# Altium PCB MotorControl.PcbDoc
Units mm, origin at the board's own origin, x right, y up, seen from the top; angles counter-clockwise.
Board outline 70.22 x 49.44 mm, 2 copper layers (Top Layer, Bottom Layer); 61 components, 50 nets, 298 pads, 132 vias.
Unrouted connection lines stored in the file: 61.
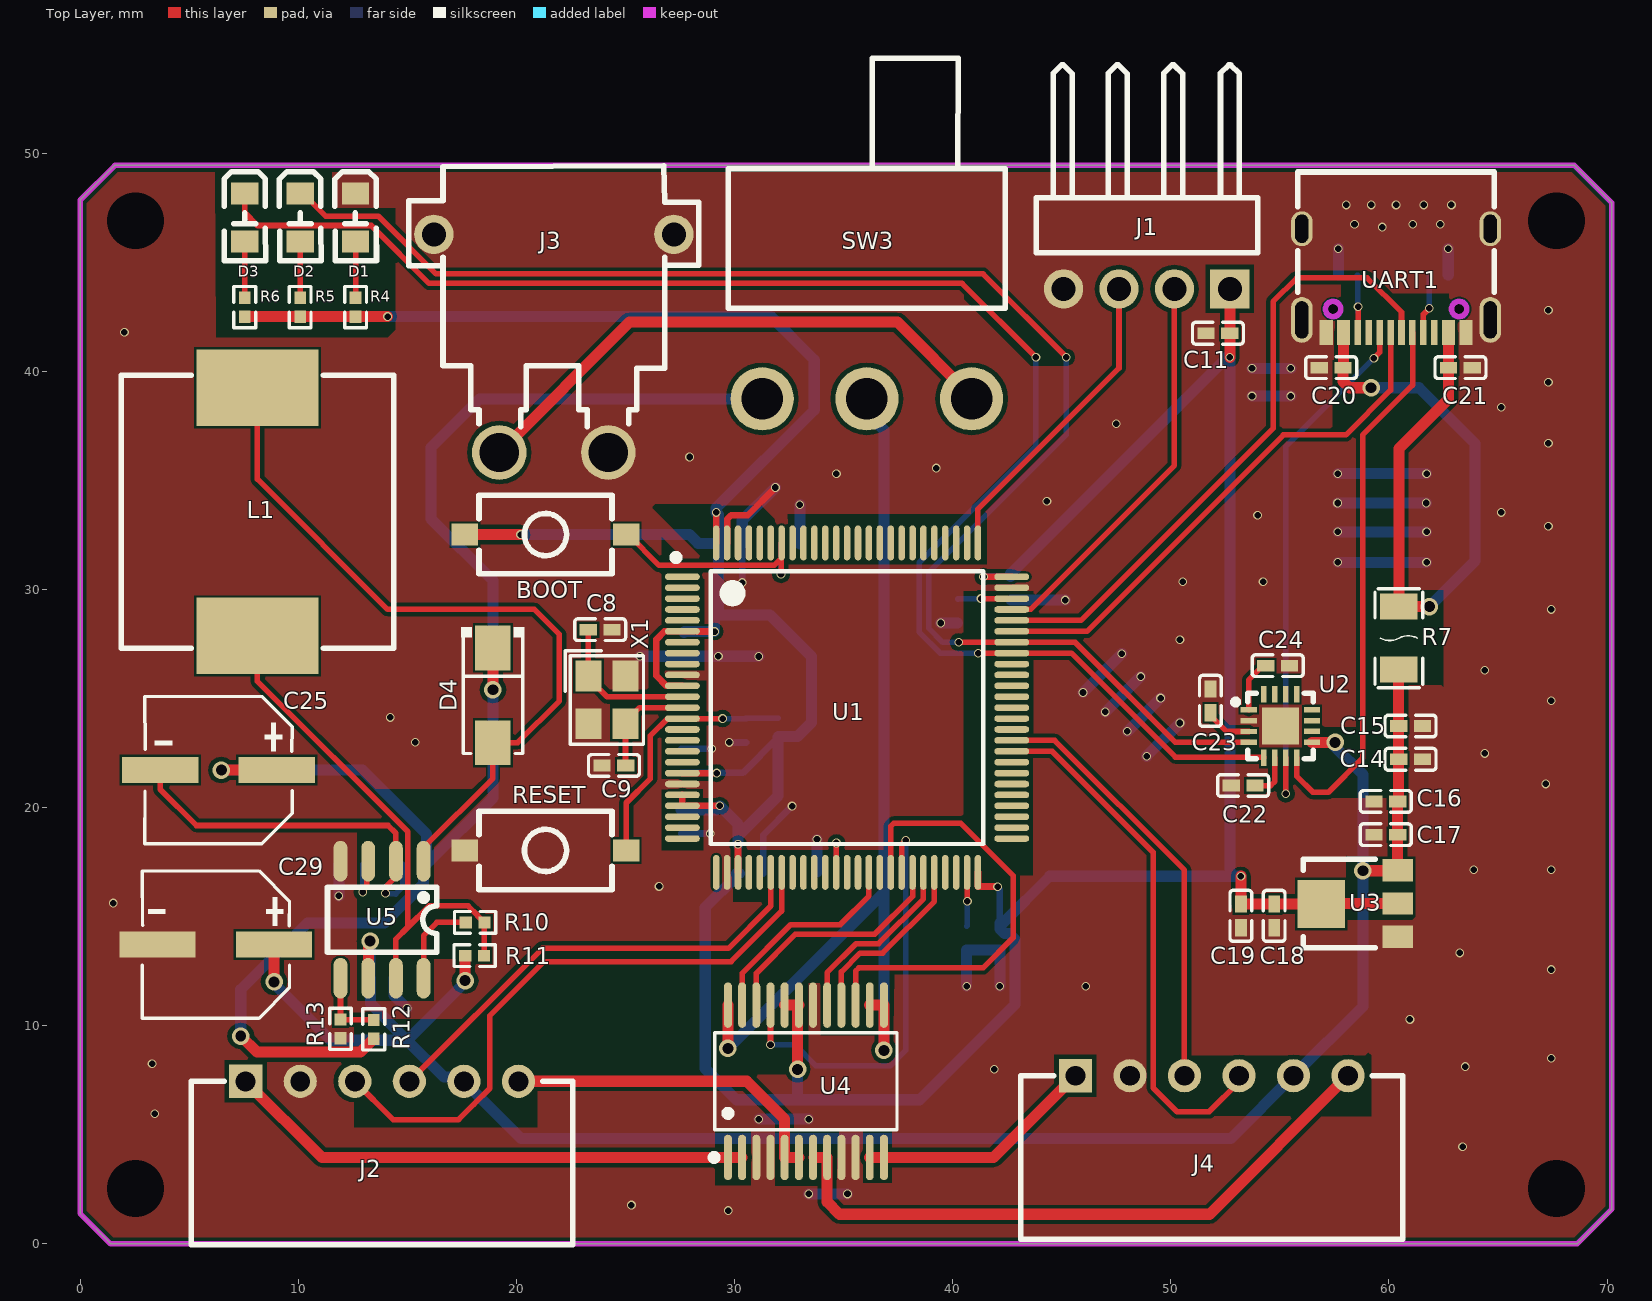
[diagram p0: Top Layer view]
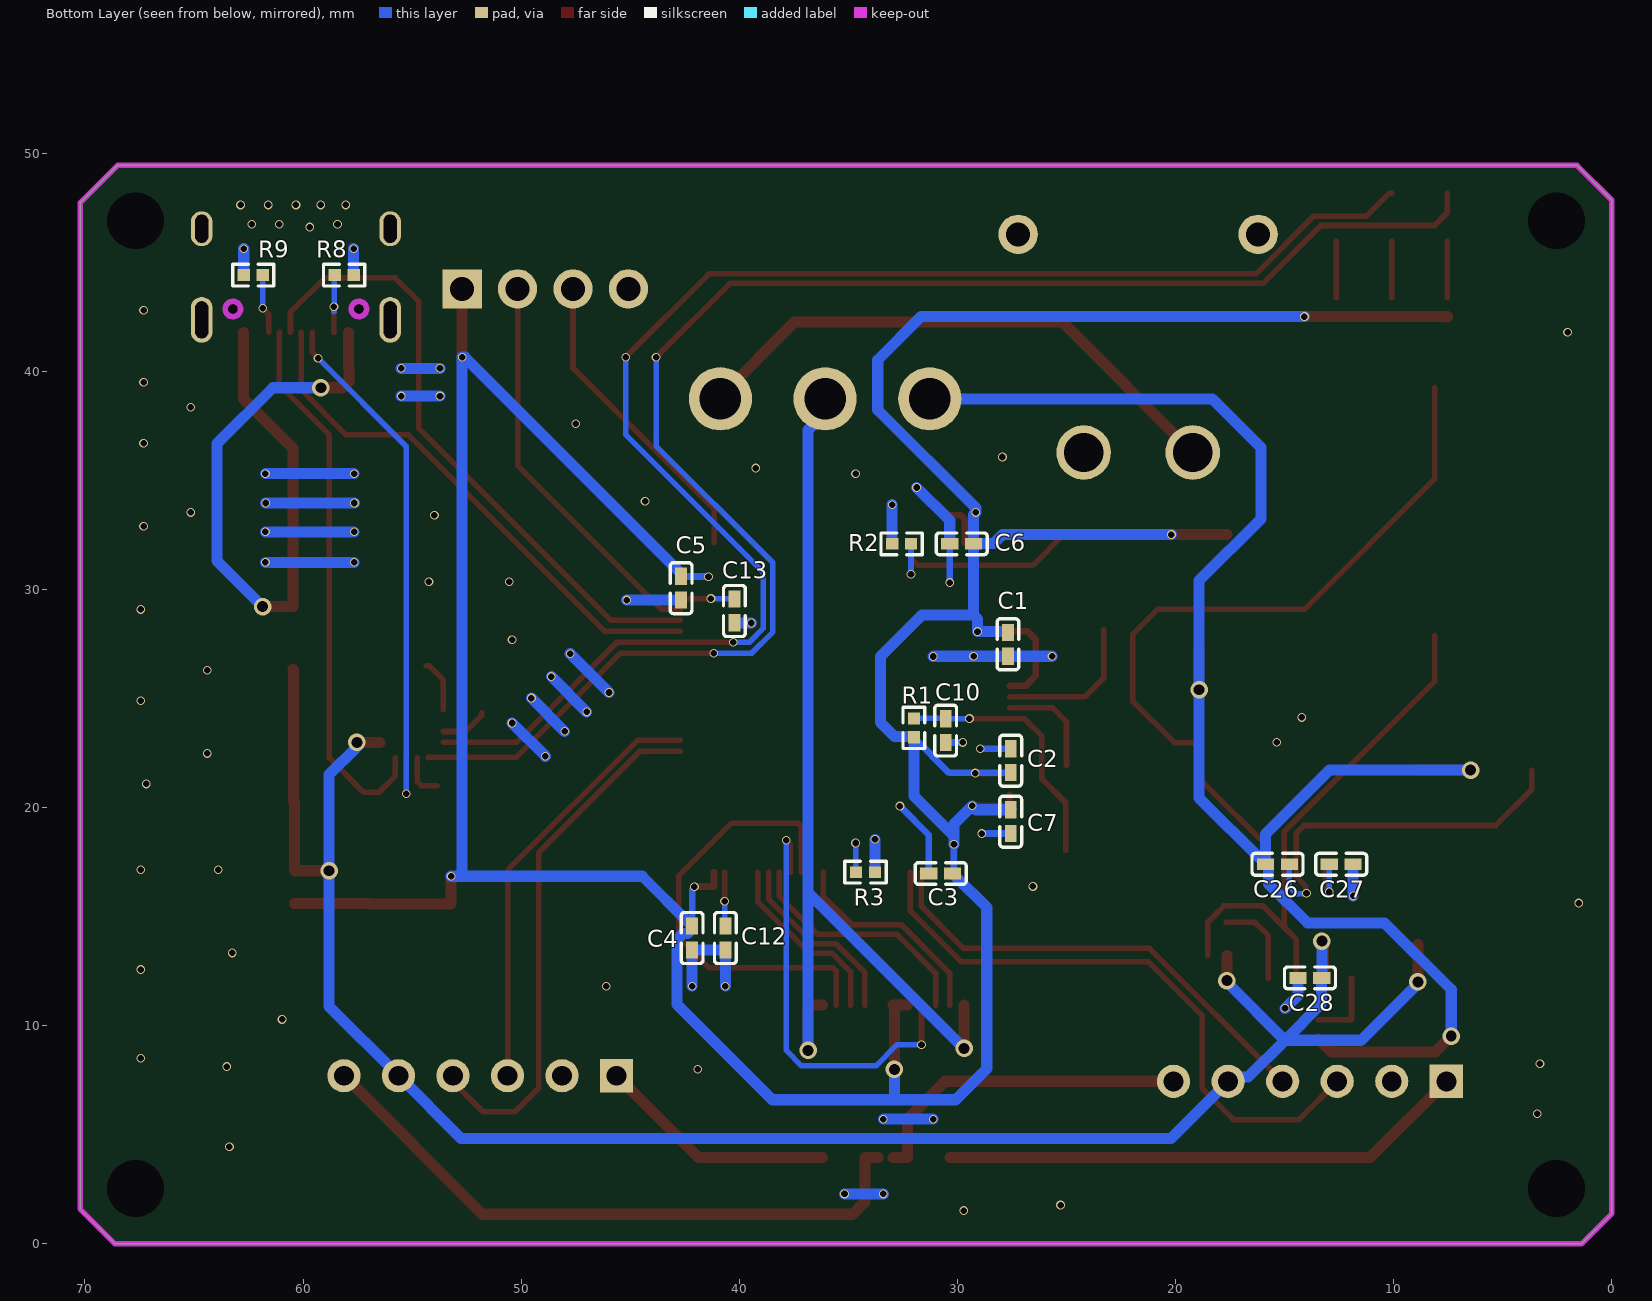
[diagram p1: Bottom Layer view, seen from below]

## Layer stack, top to bottom
Top Solder: solder mask 0.0102, Solder Resist, Dk 3.5
Top Layer: signal copper 0.0356
Dielectric 1: dielectric 0.32, FR-4, Dk 4.8
Bottom Layer: signal copper 0.0356
Bottom Solder: solder mask 0.0102, Solder Resist, Dk 3.5

## Board outline
0,1.397 1.397,0 68.621,0 70.221,1.6 70.221,47.721 68.502,49.44 1.602,49.44 0,47.838

## Design rules (kind name [scope] priority, off if disabled: settings)
Clearance [All] p1: gap=0.2 ignorepadtopadclearanceinfootprint=FALSE except(0: Arc-Hole Track-Hole SMDPad-Hole THPad-Hole Via-Hole Fill-Hole Poly-Hole Region-Hole Text-Hole; 0.1: Arc-SMDPad Track-SMDPad SMDPad-SMDPad SMDPad-Fill SMDPad-Poly SMDPad-Region; 0.18: Arc-Arc Arc-Track Arc-THPad Arc-Via Arc-Fill Arc-Poly Arc-Region Arc-Text Track-Track Track-THPad Track-Via Track-Fill Track-Poly Track-Region Track-Text; 0.5: THPad-Via Via-Via)
HoleSize [All] p1: absolutevalues=TRUE maxlimit=3.2 minlimit=0.025 maxpercent=80.000 minpercent=20.000
HoleToHoleClearance [All] p1: gap=0.305 allowstackedmicrovias=TRUE
MinimumSolderMaskSliver [All] p1: minsoldermaskwidth=0.051
PasteMaskExpansion [All] p1: expansion=0.05
PlaneClearance [All] p1: clearance=0.254
PlaneConnect [All] p1: planeconnectstyle=Direct reliefexpansion=0.508 reliefentries=4 reliefconductorwidth=0.254 reliefairgap=0.254
PolygonConnect [All] p1: connectstyle=Direct reliefconductorwidth=0.254 reliefentries=4 polygonreliefangle="90 Angle" airgapwidth=0.254
RoutingVias [All] p1: holewidth=0.3 width=0.4 viastyle="Through Hole" minholewidth=0.3 minwidth=0.4 maxholewidth=0.5 maxwidth=0.8
SilkToSilkClearance [All] p1: silktosilkclearance=0.025
SilkToSolderMaskClearance [IsPad] p1: minsilkscreentomaskgap=0.051 clearancetoexposedcopper=TRUE
SolderMaskExpansion [All] p1: expansion=0.1 istentingtop=FALSE
UnRoutedNet [All] p1: checkbadconnections=TRUE
Width PWR_Width [InNetClass('PWR')] p1: maxlimit=0.508 minlimit=0.305 preferedwidth=0.508 toplayer_prefwidth=0.305 minimp=50.000000 maximp=50.000000 favimp=50.000000
Width [All] p2: maxlimit=0.254 minlimit=0.254 preferedwidth=0.254
21 further rules are at their usual default settings.

## Classes and differential pairs
net class PWR: AO1 AO2 BO1 BO2 "EXTERNAL 12V" GND "INTERNAL 12V" "VBUS 5V" "VCC 3V3" "VCC 5V" "VM 12V"

## Components (designator, comment, footprint, x,y, rotation, side; value= is the part's Value field where it differs from the comment)
BOOT "Switch" KEY-SMD_2P-L6.0-W3.6-P7.4-LS8.0-L 21.336,18.034 r0 top (schematic designator SW2)
C1 "CAP-0402" C0402 27.686,27.481 r90 bottom
C2 "CAP-0402" C0402 27.559,22.147 r270 bottom
C3 "CAP-0402" C0402 30.771,16.977 r180 bottom
C4 "CAP-0402" C0402 42.164,14.019 r90 bottom
C5 "CAP-0402" C0402 42.672,30.058 r90 bottom
C6 "CAP-0402" C0402 29.808,32.09 r180 bottom
C7 "CAP-0402" C0402 27.559,19.353 r90 bottom
C8 "CAP-0402" C0402 23.839,28.153 r0 top
C9 "CAP-0402" C0402 24.474,21.93 r0 top
C10 "CAP-0402" C0402 30.54,23.528 r90 bottom
C11 "CAP-0402" C0402 52.16,41.742 r0 top
C12 "CAP-0402" C0402 40.64,14.019 r270 bottom
C13 "CAP-0402" C0402 40.223,29.011 r270 bottom
C14 "CAP-0402" C0402 60.989,22.213 r180 top
C15 "CAP-0402" C0402 60.989,23.737 r180 top
C16 "CAP-0402" C0402 59.854,20.279 r0 top
C17 "CAP-0402" C0402 59.854,18.755 r0 top
C18 "CAP-0402" C0402 54.737,15.035 r90 top
C19 "CAP-0402" C0402 53.213,15.035 r90 top
C20 "CAP-0402" C0402 57.348,40.163 r0 top
C21 "CAP-0402" C0402 63.275,40.163 r180 top
C22 "CAP-0402" C0402 53.313,21.009 r180 top
C23 "CAP-0402" C0402 51.816,24.888 r90 top
C24 "CAP-0402" C0402 54.901,26.502 r0 top
C25 "470uF" CAP-SMD_BD6.3-L6.6-W6.6-LS7.6-RD 6.347,21.717 r180 top
C26 "CAP-0402" C0402 15.33,17.399 r0 bottom
C27 "CAP-0402" C0402 12.409,17.399 r0 bottom
C28 "CAP-0402" C0402 13.843,12.192 r180 bottom
C29 "100uF" CAP-SMD_BD6.3-L6.6-W6.6-LS7.2-FD 6.223,13.716 r180 top
D1 "LED0805-RD" LED0805-RD 12.629,47.054 r270 top
D2 "LED0805-RD" LED0805-RD 10.089,47.054 r270 top
D3 "LED0805-RD" LED0805-RD 7.549,47.054 r270 top
D4 "SS34A" SMA_L4.4-W2.6-LS5.1-RD 18.923,25.146 r270 top
J1 "HDR-1X4" HDR-TH_4P-P2.54-H-M-W10.4 48.895,43.774 r180 top
J2 "WAFER-XH254WZ-6A" CONN-TH_6P-P2.50_WAFER-XH254WZ-6A 13.843,7.452 r0 top
J3 "XT30PW-M30.G.Y" CONN-TH_XT30PW-M 21.717,41.275 r180 top
J4 "WAFER-XH254WZ-6A" CONN-TH_6P-P2.50_WAFER-XH254WZ-6A 51.876,7.706 r0 top
L1 "" IND-SMD_L12.5-W12.5_GSDRK127P 8.128,33.556 r270 top value=150uH
R1 "RES-0402" R0402 32,23.652 r270 bottom
R2 "RES-0402" R0402 32.564,32.09 r0 bottom
R3 "RES-0402" R0402 34.216,17.036 r0 bottom
R4 "RES-0402" R0402 12.629,42.938 r270 top
R5 "RES-0402" R0402 10.089,42.938 r270 top
R6 "RES-0402" R0402 7.549,42.938 r270 top
R7 "TLC F1206" F1206 60.452,27.765 r270 top
R8 "RES-0402" R0402 58.114,44.409 r180 bottom
R9 "RES-0402" R0402 62.283,44.409 r0 bottom
R10 "RES-0402" R0402 18.109,14.732 r0 top
R11 "RES-0402" R0402 18.086,13.208 r0 top
R12 "RES-0402" R0402 13.462,9.831 r90 top
R13 "RES-0402" R0402 11.938,9.854 r270 top
RESET "Switch" KEY-SMD_2P-L6.0-W3.6-P7.4-LS8.0-L 21.336,32.512 r180 top (schematic designator SW1)
SW3 "Switch-弯插滑动开关" SW-TH_3P-SS12D06-1 36.068,38.735 r180 top
U1 "STM32F407VET6" LQFP-100_L14.0-W14.0-P0.50-LS16.0-BL 35.16,24.578 r270 top
U2 "CH343P" TQFN-16_L3.0-W3.0-P0.50-BL-EP1.7 55.02,23.737 r270 top
U3 "CJA1117B-3.3" SOT-89 60.381,15.65 r90 top
U4 "TB6612FNG" SSOP-24_L8.4-W5.8-P0.65-LS7.8-BL 33.274,7.452 r0 top
U5 "MC34063" SOP-8_L4.9-W3.9-P1.27-LS6.0-BL 13.843,14.859 r180 top
UART1 "HC-TYPE-C-16P-01A-R" USB-C-SMD_G-SWITCH_GT-USB-7010EN 60.325,44.155 r180 top
X1 "OSC CRYSTAL-SMD_4P-L3.2-W2.5-BL" CRYSTAL-SMD_4P-L3.2-W2.5-BL 24.153,24.931 r270 top

## Footprints (in the part's own frame and the unit in brackets; to place one, negate y for a bottom-side part, rotate by r counter-clockwise, add the part's x,y. Pads: shape width x height; smd on the part's side, far side on the other; paste and mask are expansions set on the pad)
C0402 [mm]
  rect 0.79x0.54 smd paste-100 mask+0.051: 1(-0.545,0) 2(0.545,0)
  silkscreen extent -1.17,-0.5 1.17,0.5
CAP-SMD_BD6.3-L6.6-W6.6-LS7.2-FD [mm]
  rect 3.5x1.2 smd: 1(-2.67,0) 2(2.67,0)
  silkscreen extent -3.38,-3.38 3.38,3.38
CAP-SMD_BD6.3-L6.6-W6.6-LS7.6-RD [mm]
  rect 3.5x1.2 smd: 1(-2.67,0) 2(2.67,0)
  silkscreen extent -3.38,-3.38 3.38,3.38
CONN-TH_6P-P2.50_WAFER-XH254WZ-6A [mil]
  rect 60x60 hole 36: 1(-246.07,0)
  round 60 hole 36: 2(-147.64,0) 3(-49.22,0) 4(49.21,0) 5(147.64,0) 6(246.06,0)
  silkscreen extent -344,-295 344,0
CONN-TH_XT30PW-M [mm]
  round 2.5 hole 1.8: 1(-2.5,5) 2(2.5,5)
  round 1.8 hole 1.1: 3(5.5,-5) 4(-5.5,-5)
  silkscreen extent -6.65,-8.15 6.65,3.81
CRYSTAL-SMD_4P-L3.2-W2.5-BL [mm]
  rect 1.4x1.2 smd paste+0 mask+0.051: 1(-1.1,-0.85) 2(1.1,-0.85) 3(1.1,0.85) 4(-1.1,0.85)
  silkscreen extent -2.26,-1.91 2.03,1.68
F1206 [mil]
  rect 46.9x68 smd paste+0 mask+2: 1(-56.9,0) 2(56.9,0)
  silkscreen extent -89,-43 89,43
HDR-TH_4P-P2.54-H-M-W10.4 [mm]
  rect 1.8x1.8 hole 1.1: 1(-3.81,0)
  round 1.8 hole 1.1: 2(-1.27,0) 3(1.27,0) 4(3.81,0)
  silkscreen extent -5.09,-10.27 5.07,-1.65
IND-SMD_L12.5-W12.5_GSDRK127P [mm]
  rect 3.5x5.6 smd: 1(-5.687,0) 2(5.687,0)
  silkscreen extent -6.25,-6.25 6.25,6.25
KEY-SMD_2P-L6.0-W3.6-P7.4-LS8.0-L [mm]
  rect 1.2x1 smd: 1(-3.7,0) 2(3.7,0)
  silkscreen extent -3.05,-1.8 3.05,1.8
LED0805-RD [mm]
  rect 1x1.25 smd paste+0 mask+0.051: 1(-1.1,0) 2(1.1,0)
  silkscreen extent -2.1,-0.95 1.98,0.96
LQFP-100_L14.0-W14.0-P0.50-LS16.0-BL [mm]
  oval 0.3x1.6 smd paste-100 mask+0.051: 1(-6,-7.55) 2(-5.5,-7.55) 3(-5,-7.55) 4(-4.5,-7.55) 5(-4,-7.55) 6(-3.5,-7.55) 7(-3,-7.55) 8(-2.5,-7.55) 9(-2,-7.55) 10(-1.5,-7.55) 11(-1,-7.55) 12(-0.5,-7.55) 13(0,-7.55) 14(0.5,-7.55) 15(1,-7.55) 16(1.5,-7.55) 17(2,-7.55) 18(2.5,-7.55) 19(3,-7.55) 20(3.5,-7.55) 21(4,-7.55) 22(4.5,-7.55) 23(5,-7.55) 24(5.5,-7.55) 25(6,-7.55) 51(6,7.55) 52(5.5,7.55) 53(5,7.55) 54(4.5,7.55) 55(4,7.55) 56(3.5,7.55) 57(3,7.55) 58(2.5,7.55) 59(2,7.55) 60(1.5,7.55) 61(1,7.55) 62(0.5,7.55) 63(0,7.55) 64(-0.5,7.55) 65(-1,7.55) 66(-1.5,7.55) 67(-2,7.55) 68(-2.5,7.55) 69(-3,7.55) 70(-3.5,7.55) 71(-4,7.55) 72(-4.5,7.55) 73(-5,7.55) 74(-5.5,7.55) 75(-6,7.55)
  oval 1.6x0.3 smd paste-100 mask+0.051: 26(7.55,-6) 27(7.55,-5.5) 28(7.55,-5) 29(7.55,-4.5) 30(7.55,-4) 31(7.55,-3.5) 32(7.55,-3) 33(7.55,-2.5) 34(7.55,-2) 35(7.55,-1.5) 36(7.55,-1) 37(7.55,-0.5) 38(7.55,0) 39(7.55,0.5) 40(7.55,1) 41(7.55,1.5) 42(7.55,2) 43(7.55,2.5) 44(7.55,3) 45(7.55,3.5) 46(7.55,4) 47(7.55,4.5) 48(7.55,5) 49(7.55,5.5) 50(7.55,6) 76(-7.55,6) 77(-7.55,5.5) 78(-7.55,5) 79(-7.55,4.5) 80(-7.55,4) 81(-7.55,3.5) 82(-7.55,3) 83(-7.55,2.5) 84(-7.55,2) 85(-7.55,1.5) 86(-7.55,1) 87(-7.55,0.5) 88(-7.55,0) 89(-7.55,-0.5) 90(-7.55,-1) 91(-7.55,-1.5) 92(-7.55,-2) 93(-7.55,-2.5) 94(-7.55,-3) 95(-7.55,-3.5) 96(-7.55,-4) 97(-7.55,-4.5) 98(-7.55,-5) 99(-7.55,-5.5) 100(-7.55,-6)
  silkscreen extent -7.03,-8 6.25,6.25
R0402 [mm]
  rect 0.566x0.54 smd paste-100 mask+0.051: 1(-0.433,0) 2(0.433,0)
  silkscreen extent -0.94,-0.5 0.94,0.5
SMA_L4.4-W2.6-LS5.1-RD [mm]
  rect 2.046x1.62 smd: 1(-2.169,0) 2(2.169,0)
  silkscreen extent -3.12,-1.44 2.67,1.44
SOP-8_L4.9-W3.9-P1.27-LS6.0-BL [mm]
  oval 0.63x1.865 smd: 1(-1.905,-2.682) 2(-0.635,-2.682) 3(0.635,-2.682) 4(1.905,-2.682) 5(1.905,2.682) 6(0.635,2.682) 7(-0.635,2.682) 8(-1.905,2.682)
  silkscreen extent -2.5,-1.5 2.5,1.48
SOT-89 [mil]
  rect 40x55 smd paste+0 mask+4: 1(-61.81,-0.58) 2(-1.81,-0.58) 3(58.19,-0.58)
  rect 86.61x86.61 smd paste+0 mask+4: 2(-2.76,137.22)
  silkscreen extent -82,39 78,169
SSOP-24_L8.4-W5.8-P0.65-LS7.8-BL [mm]
  oval 0.364x2.082 smd: 1(-3.575,-3.491) 2(-2.925,-3.491) 3(-2.275,-3.491) 4(-1.625,-3.491) 5(-0.975,-3.491) 6(-0.325,-3.491) 7(0.325,-3.491) 8(0.975,-3.491) 9(1.625,-3.491) 10(2.275,-3.491) 11(2.925,-3.491) 12(3.575,-3.491) 13(3.575,3.491) 14(2.925,3.491) 15(2.275,3.491) 16(1.625,3.491) 17(0.975,3.491) 18(0.325,3.491) 19(-0.325,3.491) 20(-0.975,3.491) 21(-1.625,3.491) 22(-2.275,3.491) 23(-2.925,3.491) 24(-3.575,3.491)
  silkscreen extent -4.36,-3.64 4.18,2.22
SW-TH_3P-SS12D06-1 [mm]
  round 2.9 hole 1.9: 1(-4.8,0) 2(0,0) 3(4.8,0)
  silkscreen extent -6.35,-15.62 6.35,-4.15
TQFN-16_L3.0-W3.0-P0.50-BL-EP1.7 [mm]
  rect 0.25x0.75 smd paste-100 mask+0.051: 1(-0.748,-1.45) 2(-0.249,-1.45) 3(0.252,-1.45) 4(0.751,-1.45) 9(0.75,1.45) 10(0.25,1.45) 11(-0.25,1.45) 12(-0.749,1.45)
  rect 0.75x0.25 smd paste-100 mask+0.051: 5(1.45,-0.75) 6(1.45,-0.25) 7(1.45,0.25) 8(1.45,0.75) 13(-1.45,0.75) 14(-1.45,0.25) 15(-1.45,-0.25) 16(-1.45,-0.75)
  rect 1.7x1.7 smd paste-100 mask+0.051: 17(0,0)
  silkscreen extent -1.5,-2.17 1.5,1.5
USB-C-SMD_G-SWITCH_GT-USB-7010EN [mm]
  oval 1x2.1 hole 0.6 slot 1.7 at 90 deg paste+0 mask+0.05: 1(-4.32,1.803) 2(4.32,1.803)
  oval 1x1.6 hole 0.6 slot 1.3 at 90 deg paste+0 mask+0.05: 3(4.32,-2.378) 4(-4.32,-2.378)
  rect 0.6x1.15 smd paste-100 mask+0.05: A1B12(-3.2,2.378) A4B9(-2.4,2.378) B1A12(3.2,2.378) B4A9(2.4,2.378)
  rect 0.3x1.15 smd paste-100 mask+0.05: A5(-1.25,2.378) A6(-0.25,2.378) A7(0.25,2.378) A8(1.25,2.378) B5(1.75,2.378) B6(0.75,2.378) B7(-0.75,2.378) B8(-1.75,2.378)
  Keep-Out Layer board cut-out: 2.89,1.652 2.82,1.652 2.692,1.599 2.593,1.5 2.54,1.372 2.54,1.232 2.593,1.104 2.692,1.005 2.82,0.952 2.89,0.952 2.96,0.952 3.088,1.005 3.187,1.104 3.24,1.232 3.24,1.372 3.187,1.5 3.088,1.599 2.96,1.652 2.89,1.652 2.89,1.652
  Keep-Out Layer board cut-out: -2.89,1.652 -2.96,1.652 -3.088,1.599 -3.187,1.501 -3.24,1.372 -3.24,1.233 -3.187,1.104 -3.088,1.006 -2.96,0.952 -2.89,0.952 -2.82,0.952 -2.692,1.006 -2.593,1.104 -2.54,1.233 -2.54,1.372 -2.593,1.501 -2.692,1.599 -2.82,1.652 -2.89,1.652 -2.89,1.652
  Keep-Out Layer circle w0.005: c2.89,1.302 r0.35
  Keep-Out Layer circle w0.254: c2.89,1.302 r0.35
  Keep-Out Layer circle w0.005: c-2.89,1.302 r0.35
  Keep-Out Layer circle w0.254: c-2.89,1.302 r0.35
  silkscreen extent -4.5,-4.98 4.5,0.54

## Part data
BOOT RESET: "滑动开关", Actuator/Cap Color=白色, Contact Current=50mA, Insulation Resistance=-, JLCPCB Part Class=扩展库, LCSC Part Name="6*3.6*2.5mm 立贴 轻触开关", Manufacturer="XKB Connectivity(中国星坤)", Manufacturer Part=TS-1101-B-W, Operating Force=160gf, Operating Temperature=-30℃~+85℃, Voltage Rating (DC)=12V, Actuator Style=矩形按钮, Add into BOM=yes, Circuit=单刀单掷, Convert to PCB=yes, Datasheet=https://atta.szlcsc.com/upload/public/pdf/source/20211011/D0E0CAF534F7B19DDE4CE68748A25BD3.pdf, Device=TS-1101-B-W_C500065, Mechanical Life=5万次, Mounting Style=立贴, Strike Gundam=否, Supplier=LCSC, Supplier Footprint=SMD, Supplier Part=C500065, Switch Height=2.5mm, Switch Length=6mm, Switch Width=3.6mm, Symbol=TS-1101-B-W, With Lamp=无
C1 C2 C3 C4 C5 C6 C7 C8 C9 C10 C11 C12 C13 C14 C15 C16 C17 C18 C19 C20 C21 C22 C23 C24 C26 C27 C28: "0402贴片电容", JLCPCB Part Class="Extended Part", LCSC Part Name="100nF ±10% 50V", Manufacturer=SAMSUNG(三星), Manufacturer Part=CL21B104KBCNNNC, Temperature Coefficient=X7R, Tolerance=±10%, Voltage Rated=50V, Add into BOM=yes, Convert to PCB=yes, Datasheet=https://atta.szlcsc.com/upload/public/pdf/source/20160103/1457707693305.pdf, Device=CL21B104KBCNNNC, Supplier=LCSC, Supplier Footprint=0805, Supplier Part=C1711, Symbol=CL21B104KBCNNNC
C25: library part RVT1C471M0607, "铝电解电容 470uF", JLCPCB Part Class="Extended Part", LCSC Part Name="470uF ±20% 16V", Lifetime @ Temp=2000hrs@105℃, Manufacturer=ROQANG(容强), Operating Temperature=-40℃~+105℃, Rated Voltage=16V, Ripple Current=185mA@120Hz, Tolerance=±20%, Add into BOM=yes, Convert to PCB=yes, Datasheet=https://atta.szlcsc.com/upload/public/pdf/source/20220223/DD822675CC1DF2F0C06D5C2255C9C2D9.pdf, Device=RVT1C471M0607, L=7.7mm, Manufacturer Part=RVT1C471M0607, Supplier=LCSC, Supplier Footprint=SMD,D6.3xL7.7mm, Supplier Part=C2977552, Symbol=RVT1C471M0607, φD=6.3mm
C29: library part RVT100UF16V67RV0016, "铝电解电容 100uF", Equivalent Series Resistance(ESR)=-, JLCPCB Part Class="Extended Part", LCSC Part Name="100uF ±20% 16V", Lifetime @ Temp=2000hrs@105℃, Manufacturer=KNSCHA(科尼盛), Operating Temperature=-55℃~+105℃, Rated Voltage=16V, Ripple Current=93mA@120Hz, Tolerance=±20%, Add into BOM=yes, Convert to PCB=yes, Datasheet=https://atta.szlcsc.com/upload/public/pdf/source/20240521/3810EB5B434F72326C196D6A9426C70A.pdf, Device=RVT100UF16V67RV0016, L=5.4mm, Manufacturer Part=RVT100UF16V67RV0016, Supplier=LCSC, Supplier Footprint=SMD,D6.3xL5.4mm, Supplier Part=C2887276, Symbol=RVT100UF16V67RV0016, φD=6.3mm
D1 D2 D3: "LED", Color Temperature=-, Forward Current=20mA, Forward Voltage (VF)=3.3V, JLCPCB Part Class="Extended Part", LCSC Part Name=LED贴片0805超高亮蓝光, Lens Color=无色透明, Manufacturer=MEIHUA(美华科技), Manufacturer Part=MHT170UBCT, Operating Temperature=-40~+85, Power Dissipation=95mW, Add into BOM=yes, Convert to PCB=yes, Datasheet=https://atta.szlcsc.com/upload/public/pdf/source/20190515/C389525_9DDE5770D44EFFE682D3E1E38A61D6F4.pdf, Device=MHT170UBCT, Diode Configuration=-, Dominant Wavelength=460nm~475nm, Luminous Flux (@25℃)=-, Luminous Intensity=225mcd, Mounting Sytle=-, Peak Wavelength=468nm, Supplier=LCSC, Supplier Footprint=0805, Supplier Part=C389525, Symbol=MHT170UBCT, Viewing Angle=140°
D4: library part SS34A_C2886580, "肖特基二极管", Forward Voltage (Vf@If)=500mV@3A, JLCPCB Part Class="Extended Part", LCSC Part Name="电压:40V 电流:3A", Manufacturer=Hottech(合科泰), Rectified Current=3A, Reverse Leakage Current (Ir)=500uA@40V, Reverse Voltage (Vr)=40V, Add into BOM=yes, Convert to PCB=yes, Datasheet=https://atta.szlcsc.com/upload/public/pdf/source/20220428/CC15BDAC1896772FBF35067304521A73.pdf, Device=SS34A_C2886580, Diode Configuration=独立式, Manufacturer Part=SS34A, Supplier=LCSC, Supplier Footprint=SMA(DO-214AC), Supplier Part=C2886580, Symbol=SS34A_C2886580
J1: library part HDR-1X4-弯排针, "1X4弯排针", Add into BOM=yes, Convert to PCB=yes, Device=HDR-M_2.54_1x4P, Supplier Footprint=插件, Supplier Part=C2935929, Symbol=PZ254V-11-04P
J2 J4: "XH2.54 6P弯插公头", Current Rating (Max)=3A, JLCPCB Part Class="Extended Part", Manufacturer=HANBO(汉博), Operating Temperature Range=-25℃~+85℃, Add into BOM=yes, Convert to PCB=yes, Datasheet=https://atta.szlcsc.com/upload/public/pdf/source/20230721/127D646758C1D4B76FEF9901992220E1.pdf, Device=WAFER-XH254WZ-6A, LCSC Part Name=WAFER-XH254WZ-6A, Manufacturer Part=WAFER-XH254WZ-6A, Mounting Style=弯插, Number of Pins=6P, Number of PINs Per Row=6, Number of Rows=1, Pins Structure=1x6P, Pitch=2.54mm, Reference Series=XH, Supplier=LCSC, Supplier Footprint=插件,P=2.5mm, Supplier Part=C7432695, Symbol=WAFER-XH254WZ-6A
J3: "XT30公头", Colour=-, contact resistance=1.2mΩ, JLCPCB Part Class="Extended Part", LCSC Part Name="AMASS(艾迈斯)航模插头 卧式弯脚 XT30PW-M公头", Manufacturer=AMASS(艾迈斯), RatedCurrent=15A, RatedVoltage="DC 500V", Add into BOM=yes, Belt length=-, Convert to PCB=yes, Datasheet=https://atta.szlcsc.com/upload/public/pdf/source/20220222/6A9F22F7850E25B33E1BE430ADF8560B.pdf, Device=XT30PW-M30.G.Y, FlameRetardantGrade=-, Input=-, InsulationMaterial=-, Interface=-, InterfaceType=公头, Manufacturer Part=XT30PW-M30.G.Y, MaximumCurrent=-, MetalMaterial=-, NumberOfUSBHoles=-, Output=-, Power=-, RecommendedWireGauge=16/18/20AWG, Size=-, specifications=2pin, Supplier=LCSC, Supplier Footprint=-, Supplier Part=C431092, Symbol=XT30PW-M, Type=航模插头, Type1=-
L1: library part "HX CYH125-150UH", "150uH贴片电感", DC Resistance (DCR)=140mΩ, JLCPCB Part Class="Extended Part", LCSC Part Name="150uH ±20%", Manufacturer=hanxia(韩下), Rated Current=2.1A, Tolerance=±20%, Add into BOM=yes, Convert to PCB=yes, Datasheet=https://atta.szlcsc.com/upload/public/pdf/source/20230829/62AFB8ACEA0AE28F73050A77CC19A792.pdf, Device="HX CYH125-150UH", Manufacturer Part="HX CYH125-150UH", Supplier=LCSC, Supplier Footprint=SMD,12.5x12.5mm, Supplier Part=C7587714, Symbol="HX CYH125-150UH"
R1 R2 R3 R4 R5 R6 R8 R9 R10 R11 R12 R13: "0402贴片电阻", JLCPCB Part Class="Extended Part", LCSC Part Name="1kΩ ±5%", Manufacturer=FH(风华), Manufacturer Part=RS-05K102JT, Operating Temperature Range=-55~+155, Overload Voltage (Max)=150V, Power(Watts)=125mW, Temperature Coefficient=±100ppm/, Tolerance=±5%, Add into BOM=yes, Convert to PCB=yes, Datasheet=https://atta.szlcsc.com/upload/public/pdf/source/20170704/1499151304704.pdf, Device=RS-05K102JT, Supplier=LCSC, Supplier Footprint=0805, Supplier Part=C115302, Symbol=RS-05K102JT
R7: "保险丝", Current Rating (Max)=100A, Hold Current=1A, JLCPCB Part Class="Extended Part", LCSC Part Name="6V 1A 自恢复", Manufacturer=TLC(竞沃), Manufacturer Part=TLC-NSMD100, Operating Temperature=-40~+85, Operating Voltage (Max)=6V, Power Dissipation=600mW, Resistance - Initial (Ri) (Min)=-, Trip Current=2A, Add into BOM=yes, Convert to PCB=yes, Datasheet=https://atta.szlcsc.com/upload/public/pdf/source/20180802/C261954_CE31CE21EEB143DB51778C363DF0F083.pdf, Device=TLC-NSMD100, Maximum Time to Trip=100ms, Resistance - Post Trip (R1) (Max)=-, Supplier=LCSC, Supplier Footprint=1206, Supplier Part=C261954, Symbol=TLC-NSMD100
SW3: "弯插滑动开关", Current Rating (DC)=2A, JLCPCB Part Class="Extended Part", LCSC Part Name="两档卧式插件 3脚拨动开关弯插 柄长5.0mm", Manufacturer="SHOU HAN(首韩)", Manufacturer Part=SS12D10G5-WJ, Operating Temperature=-25℃~+70℃, Voltage Rating (DC)=125V, Add into BOM=yes, Circuit=单刀双掷, Convert to PCB=yes, Datasheet=https://atta.szlcsc.com/upload/public/pdf/source/20230621/24203FB22DE8BDD2A5BD75F3B5E716C8.pdf, Device=SS12D10G5-WJ, Mechanical Life=3千次, Mounting Style=直插, Supplier=LCSC, Supplier Footprint=插件, Supplier Part=C7431058, Switch Length=12.7mm, Switch Width=6.7mm, Symbol=SS12D10G5-WJ
U1: "STM32F407VET6 MCU", JLCPCB Part Class=扩展库, Low-Voltage Detect=有, Manufacturer=ST(意法半导体), Operating Temperature Range=-40℃~+85℃, Operating Voltage Range=1.8V~3.6V, ADC (Bit)=12bit, Add into BOM=yes, CCP Capture/Compare=-, communication protocol=-, Convert to PCB=yes, CPU Core=CM4, CPU Maximum Speed=168MHz, DAC (Bit)=12bit, Datasheet=https://atta.szlcsc.com/upload/public/pdf/source/20140801/1457707197138.pdf, Device=STM32F407VET6, Direct Memory Access=有, GPIO Ports Number=82, Infrared Data Association=有, Internal Comparator=-, Internal Oscillator=有, LCD Module=有, LCSC Part Name=STM32F407VET6, Manufacturer Part=STM32F407VET6, Peripheral/Function=DMA；LCD/LED驱动；PWM, Program Memory Type=FLASH, Program Storage Size=512KB, PWM (Bit)=-, RAM Size=192KB, Real-Time Clock=-, Secure Digital Input and Output=-, Supplier=LCSC, Supplier Footprint=LQFP-100(14x14), Supplier Part=C28730, Symbol=STM32F407VET6, Universal Serial Bus=有, Watchdog=有
U2: "USB转串口", JLCPCB Part Class=扩展库, Manufacturer=WCH(南京沁恒), Supply Voltage=-, Add into BOM=yes, Convert to PCB=yes, Data Rate=-, Datasheet=https://atta.szlcsc.com/upload/public/pdf/source/20211010/C2846043_7FA705E1F14A2906F6A2AFA45FA28209.pdf, Device=CH343P, Manufacturer Part=CH343P, Number of Drivers/Receivers=-, Protocol=-, Supplier=LCSC, Supplier Footprint=QFN-16, Supplier Part=C2846043, Symbol=CH343P, Type=-
U3: "3.3V线性稳压器"
U4: "TB6612FNG电机驱动", BOM名称=TB6612FNG, 联系卖家，免费查找封装=唯一出售店铺网址https://shop463601444.taobao.com
U5: library part MC34063_C6454474, "DC-DC电源芯片", Input Voltage=3V~40V, JLCPCB Part Class="Extended Part", LCSC Part Name=单片DC-DC变换集成电路, Manufacturer=MSKSEMI(美森科), Operating Temperature=0℃~+70℃, Output Current=-, Add into BOM=yes, Convert to PCB=yes, Datasheet=https://atta.szlcsc.com/upload/public/pdf/source/20230524/F84E18146E118B80C4325CCA333FE83E.pdf, Device=MC34063_C6454474, Function=-, Manufacturer Part=MC34063, Number of Outputs=1, Output Type=可调, Output Voltage=-, Quiescent Current (Iq)=-, Supplier=LCSC, Supplier Footprint=SOP-8, Supplier Part=C6454474, Switch tube (built-in/external)=内置, Switching Frequency=-, Symbol=MC34063_C6454474, Synchronous Rectification=-, Topology=-
UART1: "Type-C接口", LCSC Part Name="Type-C 母座 卧贴", Manufacturer=HCTL(华灿天禄), Add into BOM=yes, Connector Type=Type-C, Convert to PCB=yes, Datasheet=https://atta.szlcsc.com/upload/public/pdf/source/20220415/23B51DCADC5F28223C40C3605487ACA1.pdf, Device=HC-TYPE-C-16P-01A-R, Gender=母座, Manufacturer Part=HC-TYPE-C-16P-01A-R, Mounting Style=卧贴, Number of Contacts=16, Number of Ports=1, Supplier=LCSC, Supplier Footprint=SMD, Supplier Part=C2997433, Symbol=HC-TYPE-C-16P-01A-R
X1: "四脚晶振", Equivalent Series Resistance (ESR)=80Ω, Frequency Stability=-, Frequency Tolerance=±10ppm, JLCPCB Part Class="Extended Part", LCSC Part Name="12MHz ±10ppm 20pF", Load Capacitance=20pF, Manufacturer=JGHC(晶光华), Manufacturer Part=S3212000201080, Operating Temperature=-40~+85, Add into BOM=yes, Convert to PCB=yes, Crystal Type=贴片无源晶振, Datasheet=https://atta.szlcsc.com/upload/public/pdf/source/20191012/C426972_E2C41F8C78BF72E52773F7737EA32F83.pdf, Device=S3212000201080, Supplier=LCSC, Supplier Footprint=SMD3225-4P, Supplier Part=C426972, Symbol=S3212000201080

## Free pads (board coordinates)
  round 1.524 hole 2.6 mask+0.9: 2(2.54,2.54) 2(2.54,46.9) 2(67.681,2.54) 2(67.681,46.9)

## Via types
v1: diameter 0.4, hole 0.3, Top Layer to Bottom Layer, 119 vias
v2: diameter 0.8, hole 0.5, Top Layer to Bottom Layer, 13 vias

## Nets (pads, with @x,y where several pads share a name; then routed paths per layer and width w, separated by ;. In a path a pad name is that pad's centre, name@x,y a point inside that pad or via, vN(x,y) a via of type N, cw(c..) or ccw(c..) an arc to the next point about the centre after c; other vN are vias at no path point)
AIN1: U1.43 U4.21 | length 19.9
  Top Layer w0.254: v1(31.649,9.129) U4.21 ; U1.43 37.66,18.315 v1(37.846,18.501)
  Bottom Layer w0.254: v1(31.649,9.129) 32.765,9.129 33.733,8.161 37.142,8.161 37.846,8.865 v1(37.846,18.501)
AIN2: U1.44 U4.22 | length 11.2
  Top Layer w0.254: U4.22 30.999,12.403 32.79,14.194 36.427,14.194 38.16,15.927 U1.44
AO1: J2.1 U4.1 U4.2 | length 24.2
  Top Layer w0.508: J2.1 11.084,3.961 U4.2
AO2: J2.6 U4.5 U4.6 | length 15.3
  Top Layer w0.508: J2.6 30.562,7.452 32.299,5.715 U4.5 U4.6
BIN1: U1.45 U4.17 | length 8.5
  Top Layer w0.254: U4.17 34.249,12.429 35.58,13.76 36.607,13.76 38.66,15.813 U1.45
BIN2: U1.46 U4.16 | length 8.5
  Top Layer w0.254: U4.16 34.899,12.466 35.759,13.326 36.787,13.326 39.16,15.699 U1.46
BO1: J4.1 U4.11 U4.12 | length 11
  Top Layer w0.508: U4.11 U4.12 41.881,3.961 J4.1
BO2: J4.6 U4.7 U4.8 | length 29.4
  Top Layer w0.508: U4.7@33.637,3.961 U4.8 34.249,1.93 34.823,1.356 51.776,1.356 J4.6
BOOT0: R2.1 RESET.1 U1.94 | length 10.7
  Top Layer w0.254: RESET.1 25.136,32.512 26.547,31.101 31.816,31.101 U1.94@32.152,31.436 ; v1(32.131,30.693) 32.152,30.714 U1.94@32.152,31.436 ; U1.94@32.152,32.119 U1.94@32.152,31.436
  Bottom Layer w0.254: v1(32.131,30.693) R2.1
BOOT1: R3.2 U1.37 | length 2.7
  Top Layer w0.254: U1.37 34.66,18.363 v1(34.671,18.374)
  Bottom Layer w0.254: R3.2 34.66,17.047 34.66,18.363 v1(34.671,18.374)
EncoderLeftA: J2.4 U1.31 | length 21.4
  Top Layer w0.254: J2.4 21.189,13.548 29.718,13.548 31.66,15.49 U1.31
EncoderLeftB: J2.3 U1.32 | length 28
  Top Layer w0.254: J2.3 14.35,5.695 17.348,5.695 18.036,6.383 18.785,7.132 18.785,10.459 21.265,12.939 29.841,12.939 32.16,15.258 U1.32
EncoderRightA: J4.4 U1.59 | length 24.4
  Top Layer w0.254: U1.59 44.564,22.578 49.195,17.947 49.195,7.152 50.292,6.055 51.759,6.055 53.126,7.422 J4.4
EncoderRightB: J4.3 U1.60 | length 19.8
  Top Layer w0.254: U1.60 44.678,23.078 50.626,17.13 J4.3
"EXTERNAL 12V": J3.2 SW3.1 | length 25.6
  Top Layer w0.508: J3.2 25.192,42.25 37.465,42.25 40.868,38.847 SW3.1
GND: BOOT.1 C1.1 C2.1 C3.1 C4.1 C5.1 C6.1 C7.1 C8.2 C9.1 C10.1 C11.1 C12.2 C13.2 C14.1 C15.1 C16.1 C17.1 C18.1 C19.1 C20.1 C21.1 C22.2 C23.2 C24.2 C27.1 C28.1 C29.2 D1.1 J1.4 J2.2 J3.1 J3.3 J3.4 J4.2 pad.2 R2.2 R3.1 R8.2 R9.2 R13.2 U1.10 U1.20 U1.27 U1.74 U1.99 U2.2 U2.17 U3.1 U4.3 U4.4 U4.9 U4.10 U4.18 U5.4 UART1.1 UART1.2 UART1.3 UART1.4 UART1.A1B12 UART1.B1A12 X1.2 X1.4 | length 71.4
  Top Layer w0.305: U1.99 29.66,33.216 29.845,33.401 30.607,33.401 v1(31.877,34.671)
  Bottom Layer w0.305: C7.1 v1(28.882,18.808) ; C2.1 v1(28.956,22.692) ; v1(29.755,22.983) C10.1 ; v1(30.353,30.312) C6.1 ; C3.1 31.316,18.743 v1(32.639,20.066)
  Bottom Layer w0.508: v1(11.864,15.949) C27.1 ; C28.1 14.388,11.393 v1(14.986,10.795) ; v1(25.666,26.936) C1.1 v1(29.263,26.936) 31.103,26.936 v1(31.115,26.924) ; C6.1 30.353,33.147 v1(31.877,34.671) ; v1(31.115,5.715) v1(33.401,5.715) ; R2.2 v1(32.997,33.886) ; v1(33.401,2.286) v1(35.179,2.286) ; v1(33.782,18.542) 33.784,18.54 R3.1 ; v1(39.455,28.46) C13.2@40.217,28.46 ; v1(40.64,11.811) C12.2 C4.1 v1(42.164,11.811) ; C5.1 v1@45.162,29.513 ; v1(45.974,25.273) v1(47.752,27.051) ; v1(46.999,24.384) v1(48.618,26.003) ; v1(48.006,23.495) v1(49.53,25.019) ; v1(48.895,22.352) v1(50.419,23.876) ; v1(53.721,38.862) v1(55.499,38.862) ; v1(53.721,40.132) v1(55.499,40.132) ; v1(57.642,33.961) v1(61.709,33.961) ; v1(57.658,31.242) v1(61.722,31.242) ; v1(57.658,32.639) v1(61.722,32.639) ; v1(57.658,35.306) v1(61.722,35.306) ; R8.2 v1(57.681,45.616) ; R9.2 v1(62.716,45.615)
  other v1: 29.718,1.524 25.273,1.778 63.373,4.445 3.429,5.969 41.91,8.001 63.5,8.128 3.302,8.255 67.437,8.509 60.96,10.287 46.101,11.811 67.437,12.573 63.246,13.335 1.524,15.621 26.543,16.383 63.881,17.145 67.437,17.145 67.183,21.082 64.389,22.479 15.367,22.987 14.224,24.13 67.437,24.892 64.389,26.289 50.419,27.686 67.437,29.083 45.163,29.512 50.546,30.353 54.229,30.353 67.31,32.893 53.975,33.401 65.151,33.528 44.323,34.036 34.671,35.306 39.243,35.56 27.94,36.068 67.31,36.703 47.498,37.592 65.151,38.354 67.31,39.497 2.032,41.783 67.31,42.799 59.69,46.609 58.42,46.736 61.087,46.736 62.357,46.736 58.039,47.625 59.182,47.625 60.325,47.625 61.595,47.625 62.865,47.625
"INTERNAL 12V": C25.1 C26.2 D4.1 R12.1 SW3.3 | length 74
  Top Layer w0.508: v2(6.477,21.717) C25.1 ; v2(7.366,9.525) 8.106,8.785 12.861,8.785 13.462,9.385 R12.1 ; v2(18.923,25.4) D4.1
  Bottom Layer w0.508: v2(6.477,21.717) 12.954,21.717 15.875,18.796 C26.2 ; v2(7.366,9.525) 7.366,11.662 10.418,14.714 13.944,14.714 15.734,16.504 C26.2@15.734,17.383 ; C26.2@16.016,17.54 18.923,20.447 v2(18.923,25.4) 18.923,30.399 16.085,33.236 16.085,36.502 18.319,38.735 SW3.3
NetC12_1: C12.1 U1.49 | length 2.5
  Top Layer w0.254: U1.49 40.669,17.02 40.669,15.714 v1(40.677,15.706)
  Bottom Layer w0.254: C12.1 40.659,14.583 40.659,15.651 40.677,15.67 v1(40.677,15.706)
NetC13_1: C13.1 U1.73 | length 2.5
  Top Layer w0.254: v1(41.303,29.578) U1.73
  Bottom Layer w0.254: C13.1 40.245,29.578 v1(41.303,29.578)
NetC22_1: C22.1 U2.6 | length 2.1
  Top Layer w0.254: C22.1 54.578,21.009 54.77,21.201 U2.6
NetC23_1: C23.1 U2.3 | length 2.2
  Top Layer w0.254: C23.1 51.816,24.218 52.548,23.486 U2.3
NetC24_1: C24.1 U2.1 | length 2.4
  Top Layer w0.254: U2.1 53.57,25.841 54.231,26.502 C24.1
NetC25_2: C25.2 C26.1 U5.2 | length 17.4
  Top Layer w0.254: C25.2 3.677,20.834 5.334,19.177 14.121,19.177 14.478,18.82 14.478,16.837 14.029,16.389 14.029,16.103 v1(14.001,16.075)
  Bottom Layer w0.254: v1(14.001,16.075) 14.029,16.047 14.449,16.047 14.466,16.03 14.785,16.348 C26.1
NetC27_2: C27.2 U5.3 | length 2.8
  Top Layer w0.254: v1(12.954,16.129) 12.954,16.169 13.136,16.351 13.136,17.47 U5.3
  Bottom Layer w0.254: v1(12.954,16.129) C27.2
NetD1_2: D1.2 R4.1 | length 2.6
  Top Layer w0.254: R4.1 D1.2
NetD2_2: D2.2 R5.1 | length 2.6
  Top Layer w0.254: R5.1 D2.2
NetD3_2: D3.2 R6.1 | length 2.6
  Top Layer w0.254: R6.1 D3.2
NetD4_2: D4.2 L1.1 U5.1 | length 34.6
  Top Layer w0.254: L1.1 8.128,35.052 14.097,29.083 20.828,29.083 21.971,27.94 21.971,24.892 20.056,22.977 D4.2 18.923,21.336 15.748,18.161 U5.1
NetL1_2: L1.2 R10.2 R11.2 U5.7 | length 24.5
  Top Layer w0.254: L1.2 8.128,25.784 15.02,18.892 15.02,14.512 ; U5.7 14.478,13.97 15.02,14.512 ; R11.2 18.53,13.22 18.53,14.731 18.207,15.055 18.207,15.076 17.788,15.494 16.002,15.494 15.02,14.512
NetR8_1: R8.1 UART1.B5 | length 2.9
  Top Layer w0.254: UART1.B5 58.585,41.787 v1(58.585,42.952)
  Bottom Layer w0.254: R8.1 58.561,44.395 58.561,42.976 v1(58.585,42.952) 58.585,42.74 58.58,42.735
NetR9_1: R9.1 UART1.A5 | length 2.7
  Top Layer w0.254: UART1.A5 61.575,42.611 v1(61.849,42.885)
  Bottom Layer w0.254: v1(61.849,42.885) R9.1
NetR10_1: R10.1 U5.8 | length 4.1
  Top Layer w0.254: U5.8 15.748,14.128 16.352,14.732 R10.1
NetR12_2: R12.2 R13.1 U5.5 | length 3.4
  Top Layer w0.254: U5.5 R13.1 11.95,10.275 13.45,10.275 R12.2
NRST: BOOT.2 C10.2 R1.1 U1.14 | length 11.9
  Top Layer w0.254: BOOT.2 25.036,20.218 26.145,21.328 26.145,23.297 26.918,24.069 27.602,24.069 U1.14 v1(29.453,24.078)
  Bottom Layer w0.254: v1(29.453,24.078) 30.513,24.078 C10.2@30.524,24.089 ; C10.2 30.552,24.085 R1.1 R1.1@32,24.098
OSC_IN: C8.1 U1.12 X1.1 | length 6.9
  Top Layer w0.254: C8.1 23.294,25.94 24.156,25.078 U1.12
OSC_OUT: C9.2 U1.13 X1.3 | length 4.9
  Top Layer w0.254: C9.2 25.003,21.946 X1.3 25.003,23.931 25.651,24.578 U1.13
PWMLeft: U1.40 U4.23 | length 9.8
  Top Layer w0.254: U4.23 30.349,12.401 32.576,14.628 34.843,14.628 36.16,15.945 U1.40
PWMRight: U1.42 U4.15 | length 21
  Top Layer w0.254: U4.15 35.549,12.502 35.698,12.651 41.394,12.651 42.774,14.031 42.774,16.875 40.364,19.285 37.309,19.285 37.16,19.136 U1.42
RX: D2.1 U1.69 U2.4 | length 70.1
  Top Layer w0.254: D2.1 10.214,48.154 11.254,47.115 13.67,47.115 16.324,44.461 41.391,44.461 v1(45.212,40.64) ; v1(40.278,27.578) U1.69 45.612,27.578 50.205,22.986 U2.4
  Bottom Layer w0.254: v1(40.278,27.578) 39.543,27.578 38.894,28.227 38.894,30.778 45.212,37.096 v1(45.212,40.64)
SWCLK: J1.3 U1.76 | length 14.3
  Top Layer w0.254: U1.76 41.16,33.682 47.625,40.146 J1.3
SWDIO: J1.2 U1.72 | length 18.3
  Top Layer w0.254: U1.72 42.719,29.087 43.57,29.087 50.165,35.682 J1.2
TX: D3.1 U1.68 U2.5 | length 72.9
  Top Layer w0.254: D3.1 7.549,47.266 8.134,46.681 13.348,46.681 16.002,44.027 40.428,44.027 v1(43.815,40.64) ; v1(41.175,27.071) 41.179,27.075 42.707,27.075 U1.68 45.446,27.078 50.213,22.311 54.268,22.311 54.27,22.309 U2.5
  Bottom Layer w0.254: v1(41.175,27.071) 39.437,27.071 38.46,28.048 38.46,31.221 43.815,36.576 v1(43.815,40.64)
UD+: U2.7 UART1.B6 | length 24.6
  Top Layer w0.254: v1(55.27,20.635) U2.7 ; v1(59.309,40.599) 59.575,40.865 UART1.B6
  Bottom Layer w0.254: v1(55.27,20.635) 55.27,36.56 v1(59.309,40.599)
UD-: U2.8 UART1.B7 | length 25.3
  Top Layer w0.254: U2.8 55.77,21.439 56.508,20.701 57.22,20.701 58.789,22.27 58.789,37.072 61.087,39.37 61.087,41.765 UART1.B7
"USB D+": U1.71 UART1.A6 | length 29.4
  Top Layer w0.254: U1.71 45.884,28.578 54.686,37.381 54.686,43.194 55.775,44.282 58.998,44.282 60.575,42.706 UART1.A6
"USB D-": U1.70 UART1.A7 | length 24.6
  Top Layer w0.254: U1.70 46.153,28.078 55.159,37.084 58.023,37.084 60.075,39.136 UART1.A7
"VBUS 5V": C20.2 C21.2 R7.1 UART1.A4B9 UART1.B4A9 | length 32.7
  Top Layer w0.508: UART1.B4A9 57.909,41.762 57.909,40.179 C20.2 57.894,39.541 58.191,39.243 v2(59.182,39.243) ; v2(61.849,29.21) R7.1 60.452,36.449 62.73,38.727 C21.2 62.728,40.166 62.728,41.775 UART1.A4B9
  Bottom Layer w0.508: v2(59.182,39.243) 61.383,39.243 63.947,36.679 63.947,31.308 v2(61.849,29.21)
"VCC 3V3": C1.2 C2.2 C3.2 C4.2 C5.2 C6.2 C7.2 C11.2 C18.2 C19.2 J1.1 R1.2 R4.2 R5.2 R6.2 RESET.2 U1.6 U1.11 U1.19 U1.21 U1.22 U1.28 U1.50 U1.75 U1.100 U3.2 U4.19 U4.20 | length 195.4
  Top Layer w0.305: U1.21 U1.22 v1(29.325,20.078) ; U1.19 v1(29.182,21.578) ; U1.11 26.878,25.578 26.416,26.04 26.416,27.702 26.793,28.078 U1.6 28.256,28.078 28.267,28.067 v1(29.083,28.067) ; U1.100 v1(29.16,33.528) ; U1.28 v1(30.16,18.313) ; U1.50 41.16,16.385 41.163,16.383 42.041,16.383 v1(42.059,16.365) ; v1(41.414,30.578) U1.75
  Top Layer w0.508: R6.2@7.549,42.492 R6.2 R5.2 R4.2 v1(14.096,42.505) ; RESET.2 v1(20.193,32.512) ; U4.20 U4.19 32.893,10.887 v2(32.893,8.001) ; v1(52.705,40.64) C11.2 J1.1 J1.1@52.711,43.768 ; v1(53.213,16.85) C19.2 C18.2 56.896,15.58 56.92,15.604 U3.2@60.396,15.604
  Bottom Layer w0.305: C2.2 27.571,21.59 30.384,21.59 32,23.206 R1.2 ; v1@30.179,18.294 30.179,17.024 C3.2 ; v1(41.414,30.578) 41.427,30.591 C5.2@42.66,30.591 ; v1(42.059,16.365) 42.059,16.339 42.164,16.234 C4.2@42.164,14.689
  Bottom Layer w0.508: v1(14.096,42.505) 31.663,42.505 33.655,40.513 33.655,38.227 29.16,33.732 v1(29.16,33.528) 29.263,33.425 C6.2 ; v1(20.193,32.512) 27.933,32.512 28.339,32.106 29.247,32.106 C6.2 ; C7.2 29.145,19.898 v1(29.325,20.078) 30.16,19.243 30.16,18.694 ; C1.2 27.686,28.051 27.702,28.067 v1(29.083,28.067) 29.083,28.649 29.263,28.829 ; v1(30.16,18.313) 30.16,18.694 ; C3.2 30.101,16.977 30.085,16.961 30.085,16.836 28.658,15.409 28.658,8.045 30.099,6.604 32.893,6.604 ; R1.2@32,23.206 32,20.533 30.16,18.694 ; R1.2 32,23.232 32.016,23.248 32.882,23.248 33.528,23.894 33.528,26.924 31.623,28.829 29.263,28.829 ; v2(32.893,8.001) 32.893,6.604 ; C5.2@42.66,30.591 42.66,30.716 52.584,40.64 v1(52.705,40.64) 52.705,16.85 ; v1(53.213,16.85) 52.705,16.85 ; 29.263,28.829 C6.2 ; 32.893,6.604 38.481,6.604 42.852,10.975 42.852,13.952 42.581,14.223 42.38,14.223 42.164,14.439 C4.2 42.164,14.689 42.18,14.705 42.305,14.705 44.45,16.85 52.705,16.85
"VCC 5V": C14.2 C15.2 C16.2 C17.2 C28.2 C29.1 J2.5 J4.5 R7.2 R11.1 U2.9 U3.3 U5.6 | length 93.6
  Top Layer w0.508: v2(8.893,12.01) C29.1 ; U5.6 13.231,12.2 13.231,13.734 13.298,13.801 v2(13.298,13.88) ; v2(17.653,12.065) R11.1 ; U2.9 v2(57.531,22.987) ; v2(58.801,17.104) 60.372,17.104 U3.3 60.398,17.13 60.398,18.753 C17.2 C16.2 60.428,20.279 60.444,20.295 C14.2 C15.2 60.444,26.312 R7.2
  Bottom Layer w0.508: v2(8.893,12.01) 8.893,11.941 11.503,9.331 14.992,9.331 ; v2(13.298,13.88) C28.2 13.308,12.182 13.308,11.015 14.992,9.331 ; v2(17.653,12.065) 17.653,11.991 14.992,9.331 ; v2(57.531,22.987) 57.531,22.775 58.801,21.505 v2(58.801,17.104) 58.801,10.881 J4.5 52.757,4.837 20.208,4.837 17.399,7.646 16.677,7.646 14.992,9.331
"VM 12V": SW3.2 U4.13 U4.14 U4.24 | length 45
  Top Layer w0.508: v2(29.699,8.957) U4.24 ; U4.14 U4.13 v2(36.849,8.868)
  Bottom Layer w0.508: v2(29.699,8.957) 36.849,16.107 ; SW3.2 36.068,38.088 36.849,37.307 36.849,16.107 ; v2(36.849,8.868) 36.849,16.107
pads on no net: U1.1 U1.2 U1.3 U1.4 U1.5 U1.7 U1.8 U1.9 U1.15 U1.16 U1.17 U1.18 U1.23 U1.24 U1.25 U1.26 U1.29 U1.30 U1.33 U1.34 U1.35 U1.36 U1.38 U1.39 U1.41 U1.47 U1.48 U1.51 U1.52 U1.53 U1.54 U1.55 U1.56 U1.57 U1.58 U1.61 U1.62 U1.63 U1.64 U1.65 U1.66 U1.67 U1.77 U1.78 U1.79 U1.80 U1.81 U1.82 U1.83 U1.84 U1.85 U1.86 U1.87 U1.88 U1.89 U1.90 U1.91 U1.92 U1.93 U1.95 U1.96 U1.97 U1.98 U2.10 U2.11 U2.12 U2.13 U2.14 U2.15 U2.16 UART1.A8 UART1.B8

## Polygon pours and split planes (outlines as drawn)
GND on Top Layer "GND_L01_P000" (solid, pour order 0): 0,1.397 1.397,0 68.621,0 70.221,1.6 70.221,47.721 68.502,49.44 1.602,49.44 0,47.838

## Keep-outs
Keep-Out Layer:
  the board outline again, w0.254

## Other copper
Top Layer:
  pour cut-out: 24.303,24.631 25.147,24.631 25.147,24.702 25.084,24.766 24.295,24.766
  pour cut-out: 16.482,14.419 18.057,14.419 18.217,14.259 18.217,13.66 17.63,13.073 16.061,13.073 16.061,13.998
  pour cut-out: 12.7,18.923 12.7,11.176 12.722,11.154 16.213,11.154 16.213,18.866 16.237,18.89
  pour cut-out: 12.7,20.828 17.907,20.828 17.907,20.763 15.61,18.466 15.46,18.466
  pour cut-out: 26.077,26.04 26.077,25.9 26.469,25.509 26.42,25.46 26.42,25.391 26.119,25.391 26.077,25.35
  pour cut-out: 37.285,9.521 37.285,10.611 35.862,12.034 35.862,12.338 37.319,12.338 37.338,12.319
  pour cut-out: 33.936,10.943 33.936,9.545 36.409,9.545 36.409,9.728 36.176,9.962 35.942,9.962
  pour cut-out: 35.905,4.286 35.903,4.288 35.903,5.211 37.207,5.211 37.211,5.207 37.211,2.809 35.895,2.809 35.905,2.819 35.905,5.235
  pour cut-out: 6.18,49.127 6.202,49.149 11.557,49.149 11.557,47.498 14.478,47.498 14.478,41.91 14.097,41.529 6.223,41.529
  pour cut-out: 58.039,17.78 58.083,17.736 61.195,17.736 61.195,14.996 61.057,14.859 58.039,14.859
  pour cut-out: 60.895,29.906 60.961,29.972 62.484,29.972 62.484,25.527 62.387,25.624 59.914,25.624 59.944,25.654 59.944,29.972
  pour cut-out: 57.22,20.388 57.279,20.447 59.944,20.447 59.944,36.519 62.288,38.863 62.288,41.1 62.285,41.102 61.4,41.102 61.4,39.274 59.102,36.976 59.102,22.174 59.078,22.15
  pour cut-out: 21.394,12.626 28.702,12.626 28.702,7.895 20.955,7.895 20.955,10.287 19.235,10.287 19.235,10.361 19.183,10.414
  pour cut-out: 60.888,42.452 62.66,42.452 62.66,42.506 62.738,42.585 62.738,43.561 60.071,43.561
  pour cut-out: 57.99,42.452 60.253,42.452 60.258,42.457 60.258,42.579 58.769,44.069 57.785,44.069 57.785,42.712 57.92,42.577
  pour cut-out: 57.398,39.793 57.404,39.788 57.404,37.465 57.825,37.465 57.893,37.397 59.041,38.545 59.041,38.63 59.004,38.667
  pour cut-out: 40.915,44.148 41.261,44.148 44.813,40.597 44.848,40.597 45.212,40.232 43.588,40.232 40.513,43.307 40.513,43.746
  pour cut-out: 56.945,23.712 58.51,23.712 58.476,23.678 58.476,22.4 57.09,21.014 56.638,21.014 55.995,21.657 55.995,22.688
  pour cut-out: 54.334,26.162 56.007,26.162 56.007,25.674 55.995,25.662 54.045,25.662 54.045,24.854 53.984,24.792 53.914,24.792 53.883,24.823 53.883,25.712
  pour cut-out: 32.449,33.45 41.372,33.45 41.473,33.552 41.551,33.474 41.551,31.156 32.465,31.156
  pour cut-out: 29.905,31.478 29.923,31.496 31.877,31.496 31.877,31.014 31.796,30.933 29.925,30.933
  pour cut-out: 31.48,32.958 31.628,33.107 31.847,33.107 31.847,33.201 31.214,33.834 29.5,33.834 29.452,33.786 29.452,33.005 29.481,32.976
  pour cut-out: 26.248,33.717 26.248,33.786 26.371,33.909 29.259,33.909 29.473,33.695 29.473,30.471 29.591,30.353
  pour cut-out: 26.67,32.385 28.588,30.467 28.613,30.467 28.613,26.289 26.649,26.289
  pour cut-out: 26.662,21.321 28.555,21.321 28.577,21.299 28.702,21.425 28.702,25.809 26.647,25.809
  pour cut-out: 28.575,18.034 26.67,18.034 26.67,20.824 28.552,20.828
  pour cut-out: 29.119,5.207 30.734,5.207 30.734,2.696 29.117,2.696
  pour cut-out: 12.573,10.287 12.573,5.334 20.955,5.334 20.955,10.287
  pour cut-out: 31.856,5.207 34.798,5.207 34.692,2.667 31.856,2.667
  pour cut-out: 28.702,12.827 28.702,7.747 33.401,7.747 33.401,12.895
  pour cut-out: 32.92,13.881 35.092,13.881 35.092,13.812 35.141,13.764 33.909,12.532 33.909,11.938 31.408,11.938 31.312,12.034 31.312,12.273
  pour cut-out: 37.338,18.034 35.585,18.034 29.933,18.034 29.933,15.684 31.347,15.684 37.083,15.684 37.211,15.812
  pour cut-out: 40.513,29.906 40.513,19.603 40.484,19.574 43.087,16.971 43.087,16.875 43.672,16.875 43.688,16.891 43.688,29.906
  pour cut-out: 58.91,8.618 59.055,8.763 59.182,8.636 59.182,5.842 50.392,5.842 50.313,5.763 50.313,8.618
  pour cut-out: 49.508,17.639 49.557,17.688 49.625,17.688 50.313,17 50.313,6.477 49.508,7.282
  pour cut-out: 38.09,18.972 40.235,18.972 41.152,18.055 41.152,17.969 41.041,17.859 38.121,17.859 37.983,17.996 37.983,18.776 38.052,18.845
  pour cut-out: 39.37,16.256 42.545,16.256 42.461,16.172 42.461,14.16 41.264,12.964 36.892,12.964
  pour cut-out: 36.449,16.256 36.576,16.383 37.846,16.383 37.846,16.055 36.298,14.507 35.331,14.507 35.282,14.556 35.282,14.624
  pour cut-out: 32.385,16.256 32.512,16.383 35.814,16.383 35.814,16.041 34.714,14.941 32.382,14.941